# EAGLE board GPS_radiologger_LG77_CMWX_MAX v8 (EAGLE 9.7.0)
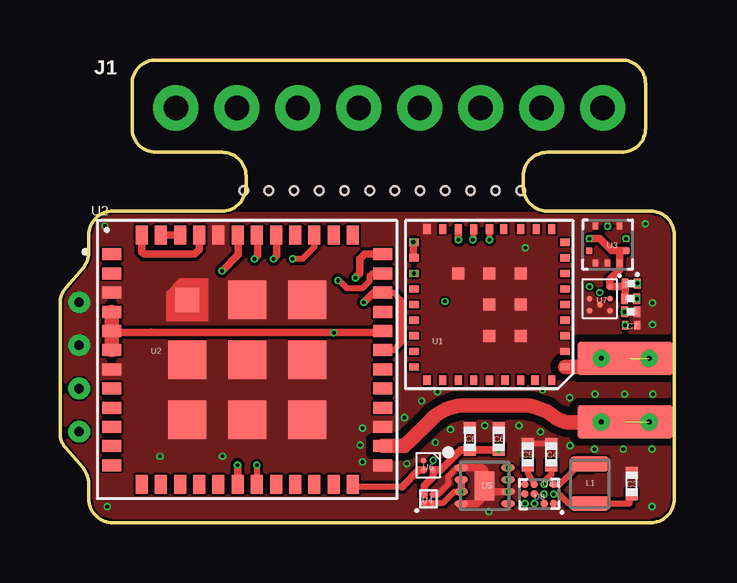
[diagram p0: board, top side]
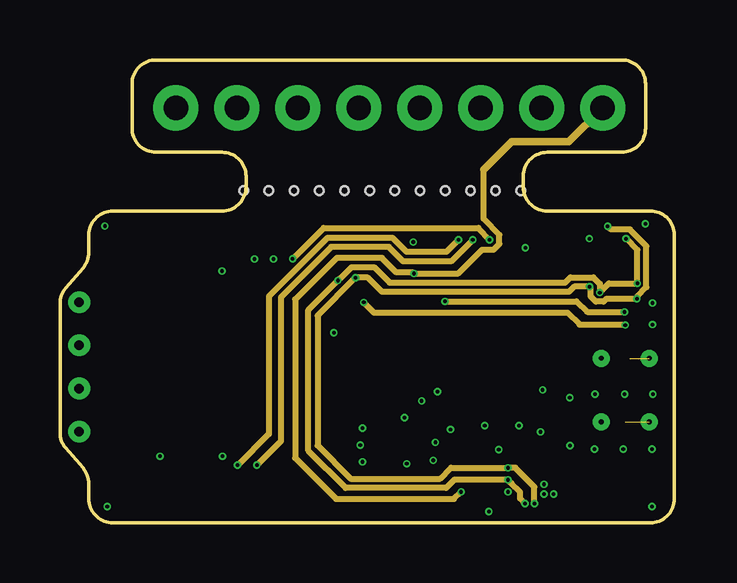
[diagram p1: board, inner layer Route2]
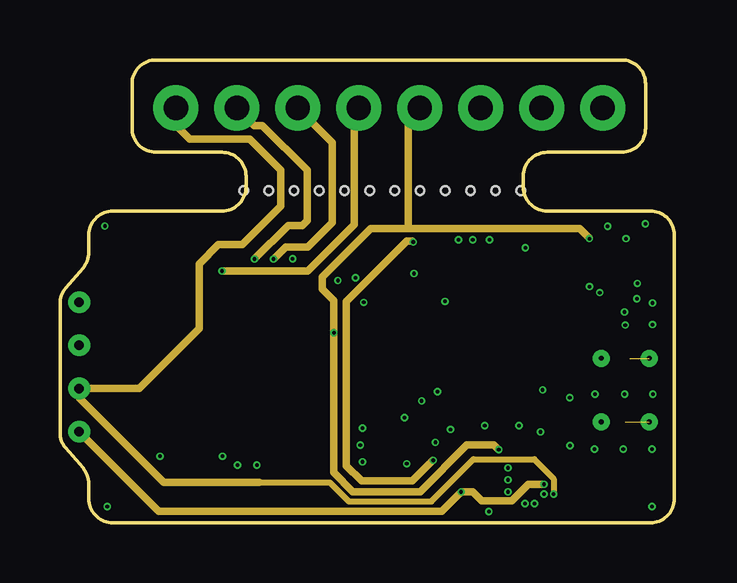
[diagram p2: board, inner layer Route15]
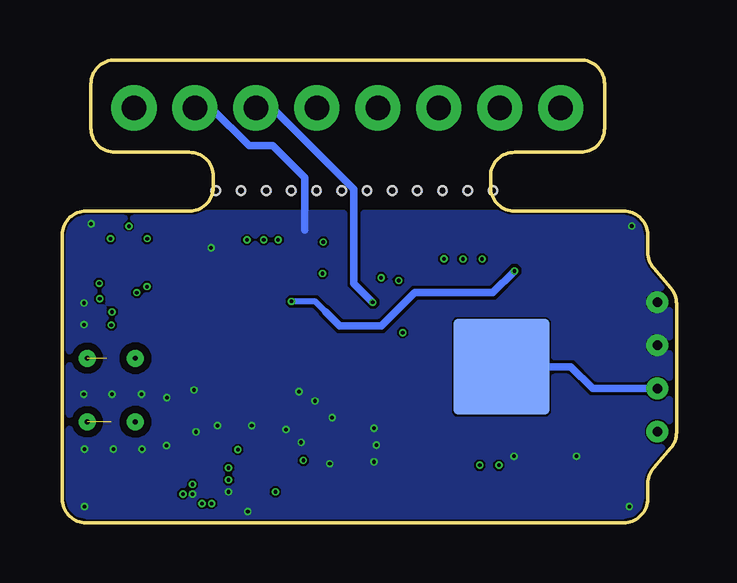
[diagram p3: board, bottom side, seen from below]

Size 25.6 x 19.3 mm. Coordinates in mm from the lower left corner, seen from the top.
Outline: 25.6,1 25.6,12 arc90 24.6,13 20.3,13 arc-90 19.3,14 19.3,14.45 arc-90 20.3,15.45 23.4,15.45 arc90 24.4,16.45 24.4,18.3 arc90 23.4,19.3 4,19.3 arc90 3,18.3 3,16.45 arc90 4,15.45 6.75,15.45 arc-90 7.75,14.45 7.75,14 arc-90 6.75,13 2.2,13 arc90 1.2,12 1.2,11.27 arc-41 0.96,10.62 0.24,9.78 arc41 0,9.13 0,3.77 arc41 0.24,3.12 0.96,2.28 arc-41 1.2,1.63 1.2,1 arc90 2.2,0 24.6,0 arc90 25.6,1
Copper layers (1*2+15*16): Top / Route2 / Route15 / Bottom
Stack-up Default Layer Stack: Top User Defined 0.035mm / Dielectric-2 User Defined 0.08mm / Route2 User Defined 0.035mm / Dielectric-1 User Defined 0.13mm / Route15 User Defined 0.035mm / Dielectric-3 User Defined 0.08mm / Bottom User Defined 0.035mm
Design rules "default *": minimum track width 5mil, minimum drill 0.15mm, track to track 5mil, track to pad 3mil, pad to pad 3mil, via to via 3mil, smd to smd 3mil, copper to edge 3mil, drill to drill 3mil, minimum pad ring 10mil, minimum via ring 3mil, stop-mask expansion 0mil, vias tented up to drill 20mil, thermal gap 0mil
Net classes: 0 default: width 0.254 mm; 1 power: width 0.305 mm; 2 antenna: width 0.61 mm, clearance 0.305 mm; 3 battery: width 0.254 mm; 4 diff_pair: width 0.178 mm, clearance 0.152 mm
Holes 0.35 mm at 7.65,13.85 8.7,13.85 9.75,13.85 10.8,13.85 11.85,13.85 12.9,13.85 13.95,13.85 15,13.85 16.05,13.85 17.1,13.85 18.15,13.85 19.2,13.85

## Footprints (pad centres in the part's own frame; a part is rotated, then mirrored left to right if it is on the bottom)
ICARUS_NITINOL_ANTENNA_SHORT = smd 4 x 1.4: 1 0,0 | drill 0.2: 2 -1,0; 3 1,0
C-0402-SMALL = smd 0.5 x 0.5: P$1 -0.45,0; P$2 0.45,0
C0201 = smd 0.25 x 0.35: 1 -0.25,0; 2 0.25,0
1X08_NO_SILK = drill 1.016 pad 1.88: 1 0,0; 2 2.54,0; 3 5.08,0; 4 7.62,0; 5 10.16,0; 6 12.7,0; 7 15.24,0; 8 17.78,0
INDC2016X120L = smd 0.6 x 1.612: 1 -0.825,0; 2 0.825,0
R0201 = smd 0.28 x 0.43: 1 -0.255,0; 2 0.255,0
XCVR_CMWX1ZZABZ-078 = smd 0.8 x 0.5: 1 -5.65,4.4; 2 -5.65,3.6; 3 -5.65,2.8; 4 -5.65,2; 5 -5.65,1.2; 6 -5.65,0.4; 7 -5.65,-0.4; 8 -5.65,-1.2; 9 -5.65,-2; 10 -5.65,-2.8; 11 -5.65,-3.6; 12 -5.65,-4.4; 25 5.65,-4.4; 26 5.65,-3.6; 27 5.65,-2.8; 28 5.65,-2; 29 5.65,-1.2; 30 5.65,-0.4; 31 5.65,0.4; 32 5.65,1.2; 33 5.65,2; 34 5.65,2.8; 35 5.65,3.6; 36 5.65,4.4 | smd 0.5 x 0.8: 13 -4.4,-5.2; 14 -3.6,-5.2; 15 -2.8,-5.2; 16 -2,-5.2; 17 -1.2,-5.2; 18 -0.4,-5.2; 19 0.4,-5.2; 20 1.2,-5.2; 21 2,-5.2; 22 2.8,-5.2; 23 3.6,-5.2; 24 4.4,-5.2; 37 4.4,5.2; 38 3.6,5.2; 39 2.8,5.2; 40 2,5.2; 41 1.2,5.2; 42 0.4,5.2; 43 -0.4,5.2; 44 -1.2,5.2; 45 -2,5.2; 46 -2.8,5.2; 47 -3.6,5.2; 48 -4.4,5.2 | smd 1 x 1: 49 -2.5,2.5 | smd 1.6 x 1.6: 50 0,2.5; 51 2.5,2.5; 52 -2.5,0; 53 0,0; 54 2.5,0; 55 -2.5,-2.5; 56 0,-2.5; 57 2.5,-2.5
PQFN50P200X200X80-10N = smd 0.275 x 0.25: 1 -0.765,0.25; 2 -0.765,-0.25; 6 0.765,-0.25; 7 0.765,0.25 | smd 0.25 x 0.275: 3 -0.5,-0.765; 4 0,-0.765; 5 0.5,-0.765; 8 0.5,0.765; 9 0,0.765 | smd 0.255 x 0.275: 10 -0.5,0.765
BGA4N35P2X2_70X70X40N = smd 0.26 x 0.26: A1 -0.175,0.175; A2 0.175,0.175; B1 -0.175,-0.175; B2 0.175,-0.175
SON50P200X200X75-9T80X120L = smd 0.562 x 0.282: 1 -0.975,0.75; 2 -0.975,0.25; 3 -0.975,-0.25; 4 -0.975,-0.75; 5 0.975,-0.75; 6 0.975,-0.25; 7 0.975,0.25; 8 0.975,0.75 | smd 0.8 x 1.2: 9 0,0
YFP0004-DSBGA = smd 0.25 x 0.25: A1 0.2,-0.2; A2 -0.2,-0.2; B1 0.2,0.2; B2 -0.2,0.2
WLCSP8 = smd 0.24 x 0.24: P$1 -0.5,0.425; P$2 0,0.425; P$3 0.5,0.425; P$4 -0.25,0; P$5 0.25,0; P$6 -0.5,-0.425; P$7 0,-0.425; P$8 0.5,-0.425
BGA12N40P4X3_123X163X64N = smd 0.32 x 0.32: A1 -0.6,0.4; A2 -0.2,0.4; A3 0.2,0.4; A4 0.6,0.4; B1 -0.6,0; B2 -0.2,0; B3 0.2,0; B4 0.6,0; C1 -0.6,-0.4; C2 -0.2,-0.4; C3 0.2,-0.4; C4 0.6,-0.4
LG77L = smd 0.4 x 0.3: P$1 -3.15,2.6; P$2 -3.15,1.95; P$3 -3.15,1.3; P$4 -3.15,0.65; P$5 -3.15,0; P$6 -3.15,-0.65; P$7 -3.15,-1.3; P$8 -3.15,-1.95; P$9 -3.15,-2.6; P$19 3.15,-2.6; P$20 3.15,-1.95; P$21 3.15,-1.3; P$22 3.15,-0.65; P$23 3.15,0; P$24 3.15,0.65; P$25 3.15,1.3; P$26 3.15,1.95; P$27 3.15,2.6 | smd 0.3 x 0.4: P$10 -2.6,-3.15; P$11 -1.95,-3.15; P$12 -1.3,-3.15; P$13 -0.6,-3.15; P$14 0,-3.15; P$15 0.65,-3.15; P$16 1.3,-3.15; P$17 1.95,-3.15; P$18 2.6,-3.15; P$28 2.6,3.15; P$29 1.95,3.15; P$30 1.3,3.15; P$31 0.65,3.15; P$32 0,3.15; P$33 -0.65,3.15; P$34 -1.3,3.15; P$35 -1.9,3.15; P$36 -2.6,3.15 | smd 0.5 x 0.5: P$37 0,0; P$38 0,1.3; P$39 -1.3,1.3; P$40 -1.3,0; P$41 -1.3,-1.3; P$42 0,-1.3; P$43 1.3,-1.3
BATT_CONNECT = drill 0.4: P$1 0,0
TJC_POS_ONLY = smd 4 x 4: P$1 0,0

## Placement (x,y rotation side)
ANT_GPS  NITINOL_ANTENNA_SHORT  [ICARUS_NITINOL_ANTENNA_SHORT]  23.55,6.86 0 top
ANT_LORA  NITINOL_ANTENNA_SHORT  [ICARUS_NITINOL_ANTENNA_SHORT]  23.55,4.21 0 top
C3  10UF  [C-0402-SMALL]  23.81,1.63 270 top
C4  1.0UF  [C-0402-SMALL]  20.47,2.85 270 top
C5  1.0UF  [C-0402-SMALL]  19.49,2.85 270 top
C6  1 uF  [C-0402-SMALL]  18.28,3.5 270 top
C7  [C0201]  23.8,8.24 0 top
C8  1 uF  [C-0402-SMALL]  17.08,3.5 90 top
J1  [1X08_NO_SILK]  22.61,17.3 180 top
L1  4.7 uH  [INDC2016X120L]  22.07,1.63 90 top
R1  4.7 k  [R0201]  23.78,9.35 180 top
R2  4.7 k  [R0201]  23.8,9.98 180 top
R3  10k  [R0201]  23.79,8.8 180 top
U2  CMWX1ZZABZ-078  [XCVR_CMWX1ZZABZ-078]  7.8,6.8 0 top
U3  BMP388  [PQFN50P200X200X80-10N]  22.82,11.6 180 top
U4  TPS7A03-DSBGA  [BGA4N35P2X2_70X70X40N]  15.35,1 90 top
U5  MAX17048G+  [SON50P200X200X75-9T80X120L]  17.69,1.54 0 top
U6  TPS22907YZT  [YFP0004-DSBGA]  15.35,2.4 90 top
U7  CAT24_WLCSP8  [WLCSP8]  22.49,9.35 270 top
U8  MAX20361  [BGA12N40P4X3_123X163X64N]  19.97,1.2 180 top
U$1  LG77L  [LG77L]  17.9,9.1 180 top
U$2  BATT_CONNECT  [BATT_CONNECT]  0.8,3.8 0 top
U$3  BATT_CONNECT  [BATT_CONNECT]  0.8,9.2 0 top
U$4  BATT_CONNECT  [BATT_CONNECT]  0.8,7.4 0 top
U$5  TJC_BASIC  [TJC_POS_ONLY]  7.3,6.5 0 bottom
U$6  BATT_CONNECT  [BATT_CONNECT]  0.8,5.6 0 top

## Library data of the parts
ANT_GPS ANT_LORA = Antenna
C3-C6 C8 U4 U5 U7 U8 U$2-U$6 = Ryan_Custom_Fusion
C7 = rcl; SPICEPREFIX: C
J1 = SparkFun-Connectors; PROD_ID: CONN-08438
L1 = Ryan_custom
R1-R3 = rcl; SPICEPREFIX: R
U2 = CMWX1ZZABZ-078; AVAILABILITY: In Stock; DESCRIPTION: General ISM < 1GHz LoRa™ Transceiver Module 868MHz, 915MHz - Surface Mount; MF: Murata; MP: CMWX1ZZABZ-078; PACKAGE: Module Murata; PRICE: None; PURCHASE-URL: https://pricing.snapeda.com/search/part/CMWX1ZZABZ-078/?ref=eda
U3 = BMP388; AVAILABILITY: Unavailable; DESCRIPTION: Pressure Sensor 4.35PSI ~ 18.13PSI (30kPa ~ 125kPa) Absolute 10-WFLGA; MF: Bosch Sensortec; MP: BMP388; PACKAGE: WFLGA-10 Bosch Tools; PRICE: None
U6 = TPS22916
U$1 = Quectel

## Nets
BAT [battery]: C4.P$2 J1.1 U4.A1 U4.B1 U5.2 U5.3 U8.C2 U$1.P$21 U$2.P$1
BOOT: J1.5 R3.2 U2.43
GND: C3.P$1 C4.P$1 C5.P$1 C6.P$1 C7.2 C8.P$2 J1.2 R3.1 U2.3 U2.7 U2.25 U2.27 U2.44 U2.49 U2.50 U2.51 U2.52 U2.53 U2.54 U2.55 U2.56 U2.57 U3.3 U3.5 U3.8 U3.9 U4.B2 U5.1 U5.4 U5.6 U5.9 U6.B1 U7.P$3 U7.P$5 U7.P$7 U7.P$8 U8.B2 U$1.P$2 U$1.P$18 U$1.P$37 U$1.P$38 U$1.P$39 U$1.P$40 U$1.P$41 U$1.P$42 U$1.P$43 U$3.P$1 U$4.P$1
GPS_ON: U2.24 U6.B2
GPS_PWR: U6.A1 U$1.P$19 U$1.P$20
GPS_RST: U2.39 U$1.P$14
N$2 [antenna]: ANT_GPS.1 ANT_GPS.2 ANT_GPS.3 U$1.P$1
N$3: L1.2 U8.C1
N$4: C5.P$2 U8.C3
N$11 [antenna]: ANT_LORA.1 ANT_LORA.2 ANT_LORA.3 U2.26
N$15 [battery]: C3.P$2 J1.8 L1.1 U8.B1 U$5.P$1 U$6.P$1
OSC_IN: U2.46 U2.47
OSC_OUT: U2.45 U2.48
POWER [power]: C6.P$2 C8.P$1 J1.4 R1.2 R2.2 U2.4 U2.5 U2.6 U2.32 U3.1 U3.6 U3.10 U4.A2 U6.A2 U7.P$1
RST: C7.1 J1.3 U2.31 U2.34
RX: U2.19 U$1.P$15
SCL: R2.1 U2.35 U3.2 U5.7 U7.P$4 U8.A4
SDA: R1.1 U2.36 U3.4 U5.8 U7.P$6 U8.A3
SWDCLK: J1.7 U2.42
SWDIO: J1.6 U2.41
TX: U2.18 U$1.P$16

## Tracks (layer width: path | path; a pad name or v marks a point on that pad's centre or on a via)
BAT  (via drill 0.15)
  Top 0.254: U8.C2 20.2,1.58 20.2,1.74 20.47,2.01 C4.P$2 | U4.A1 U4.B1 15.98,0.83 16.43,1.29 v16.71,1.29 | v14.75,10.39 | U$1.P$21 v14.75,10.39
  Top 0.305: v16.71,1.29 U5.2
  Route2 0.254: v16.71,1.29 16.41,0.99 11.51,0.99 9.8,2.7 9.8,9.31 11.54,11.05 13.41,11.05 14.02,10.44 14.71,10.44 v14.75,10.39 16.59,10.39 17.59,11.39 18.07,11.39 18.31,11.63 18.31,12.01 17.65,12.67 17.65,14.72
  Route2 0.305: J1.1 21.21,15.9 18.83,15.9 17.65,14.72
  Route15 0.305: U8.C2 19.51,1.6 18.82,0.91 17.58,0.91 17.2,1.29 v16.71,1.29 15.91,0.49 4.11,0.49 U$2.P$1
  other vias: 20.17,1.6
BOOT  (via drill 0.15)
  Top 0.305: v6.75,10.5 7.44,11.19 7.44,11.96 U2.43 | R3.2 v23.52,8.79
  Route2 0.254: v16.04,9.23 21.52,9.23 21.96,8.79 v23.52,8.79
  Route15 0.305: v6.75,10.5 10.33,10.5 12.25,12.43 12.25,17.11 J1.5
  Bottom 0.254: v16.04,9.23 15.06,9.23 14.61,8.78
  Bottom 0.305: v6.75,10.5 7.65,9.6 10.9,9.6 12.3,8.2 14.03,8.2 14.61,8.78
GND  (via drill 0.15)
  Top 0.254: C4.P$1 C5.P$1 | U4.B2 15.72,1.18 16.19,1.64 16.18,1.95 16.52,2.29 U5.1
  Top 0.305: U5.6 17.94,1.29 17.9,1.33 | 17.9,1.33 U5.9 17.7,2.18 17.59,2.29 U5.1 | U5.4 17.36,0.79 17.9,1.33
  Bottom 0.305: 15.5,12.2 15.5,14.4 16.83,15.73 17.81,15.73 19.38,17.3 J1.2
  other vias: 20.11,5.54 15.73,5.47 15.07,5.08 14.35,4.38 16.27,3.89 19.13,4.05 22.29,5.37 23.53,5.37 24.7,5.37 21.24,5.21 20.17,1.2 18.66,1.29 15.64,3.35 14.45,2.46 20.02,3.79 17.7,4.05 21.25,3.21 12.51,3.24 24.67,3.07 23.47,3.07 22.27,3.07 24.69,8.27 24.69,9.17 24.39,12.47 19.39,11.47 6.77,2.77 4.17,2.77 24.67,0.67 17.87,0.47 1.97,0.67 1.87,12.37 12.61,3.94 12.61,2.54
  pour Top: -0.1,12.95 26.07,12.95 26.16,-1.4 -0.1,-1.4
  pour Bottom: -0.47,13.05 26.41,13.05 26.41,-1.73 -0.59,-1.73 -0.59,-0.04
GPS_ON
  Top 0.254: 14.25,1.5 12.3,1.5 U2.24
  Top 0.305: U6.B2 14.95,2.2 14.25,1.5
GPS_PWR  (via drill 0.15)
  Top 0.254: U$1.P$19 v14.72,11.7 v14.72,11.71
  Top 0.305: U$1.P$20 14.72,11.07 v14.72,11.7
  Route15 0.305: U6.A1 15.53,2.6 14.68,1.75 12.56,1.75 11.93,2.38 11.93,9.23 14.44,11.74 14.69,11.74 v14.72,11.71
  other vias: 15.55,2.6
GPS_RST  (via drill 0.15)
  Top 0.254: U2.39 10.6,11.5 10.1,11 v9.7,11 v9.69,11.01 | U$1.P$14 v17.9,11.8
  Route2 0.254: v9.69,11.01 10.99,12.3 17.44,12.3 v17.9,11.8
N$2  (1 unrouted)
  Top 0.61: 23.74,6.85 23.69,6.86 ANT_GPS.1 ANT_GPS.2 | U$1.P$1 22.7,6.5 ANT_GPS.3
N$3
  Top 0.254: U8.C1 20.82,1.6 21.67,2.46
  Top 0.61: L1.2 21.67,2.46
N$4
  Top 0.254: U8.C3 19.74,1.6 19.74,1.71 19.49,2.07 C5.P$2
N$11  (1 unrouted)
  Top 0.61: U2.26 14.35,3.2 14.63,3.48 15.4,4.22 arc-44 16.73,4.89 19.26,4.89 arc-39 20.57,4.44 arc39 21.33,4.18 22.52,4.18 | 22.52,4.18 ANT_LORA.2 | ANT_LORA.1 23.52,4.18 22.52,4.18
N$15  (via drill 0.15)
  Top 0.254: U8.B1 20.79,1.2 21.17,0.82 L1.1 23.74,0.81 C3.P$2
  Route15 0.254: U8.B1 20.57,1.84 19.77,2.64 17.22,2.64 15.47,0.89 12.03,0.89 11.25,1.68 8.3,1.68
  Route15 0.305: 8.3,1.68 4.32,1.68 0.8,5.2 U$6.P$1 3.3,5.6 5.8,8.1 5.8,10.8 6.6,11.6 7.6,11.6 9.2,13.2 9.2,14.7 7.9,16 5.4,16 4.83,16.57 J1.8
  Bottom 0.305: U$6.P$1 3.5,5.6 4.4,6.5 U$5.P$1
  other vias: 20.57,1.2
OSC_IN
  Top 0.305: U2.46 U2.47
OSC_OUT
  Top 0.305: U2.48 3.4,11.3 3.5,11.2 5.6,11.2 5.8,11.4 U2.45
POWER  (via drill 0.15)
  Top 0.305: U3.6 22.49,11.85 22.99,11.35 23.34,11.35 | 23.34,11.35 U3.1 | 23.34,11.35 23.32,11.33 U3.10 23.32,10.55 22.91,10.14 U7.P$1 23.41,9.85 R2.2 23.54,9.37 R1.2 | U4.A2 15.18,1.54 15.55,1.92 U6.A2 15.86,2.21 15.99,2.34 16,2.34 16.71,3.05 C8.P$1 C6.P$2 | 3.81,7.94 3.8,7.95 | v11.42,7.94 3.81,7.94 | v11.41,7.93 v11.42,7.94 | U2.32 13.39,7.94 v11.42,7.94 | 3.81,7.94 2.21,7.94 U2.5
  Top 0.61: U2.6 U2.5 U2.4
  Route15 0.305: U3.6 22.05,11.87 21.65,12.27 14.5,12.27 | C6.P$2 18.08,3.25 16.95,3.25 15,1.3 12.2,1.3 11.41,2.09 v11.41,7.93 11.41,9.27 10.93,9.75 10.93,10.25 12.95,12.27 14.5,12.27 | 14.5,12.27 14.5,16.68 14.99,17.17 J1.4
  other vias: 22.05,11.85 18.28,3.05
RST  (via drill 0.15)
  Top 0.254: U2.34 13.9,9.6 14.2,9.3 14.2,7.5 13.9,7.2 U2.31
  Top 0.305: U2.34 13.07,9.6 v12.66,9.19
  Route2 0.254: v12.66,9.19 13.08,8.77 21.14,8.77 21.65,8.26 23.54,8.26 C7.1
  Bottom 0.305: v12.66,9.19 13.45,9.98 13.45,13.92 16.83,17.3 J1.3
  other vias: 23.55,8.24
RX  (via drill 0.15)
  Top 0.254: v8.2,2.4 U2.19 | v17.2,11.8 17.24,11.85 U$1.P$15
  Route2 0.254: v17.2,11.8 16.3,10.9 14.3,10.9 13.7,11.5 11.3,11.5 9.2,9.4 9.2,3.4 v8.2,2.4
SCL  (via drill 0.15)
  Top 0.254: v11.58,10.1 11.58,10.12 11.6,10.14 11.96,9.78 12.61,9.78 12.9,10.07 12.9,10.3 13,10.4 U2.35
  Route2 0.254: U8.A4 19.17,1 19.17,1.29 18.81,1.64 U5.7 16.43,1.79 16.09,1.45 11.9,1.45 10.35,3 10.35,8.88 v11.58,10.1 11.67,10.19 11.69,10.19 12.15,10.66 13.09,10.66 13.74,10.01 21.04,10.01 21.26,10.23 22.22,10.23 22.49,9.96 U7.P$4 22.87,9.98 v24.05,9.98 24.05,11.38 v23.58,11.85
  other vias: 19.37,0.8 18.66,1.79 22.49,9.6
SDA  (via drill 0.15)
  Top 0.254: 12.33,10.22 v12.31,10.22
  Top 0.305: U2.36 12.7,11.2 12.49,10.99 12.49,10.4 v12.31,10.22
  Route2 0.254: U8.A3 19.77,1.49 18.97,2.29 U5.8 16.29,2.29 15.84,1.84 12.11,1.84 10.73,3.22 10.73,8.64 v12.31,10.22 12.83,10.22 13.42,9.63 21.2,9.63 21.42,9.85 U7.P$6 22.11,9.81 22.11,9.44 22.33,9.22 22.65,9.22 22.77,9.34 R1.1 v24.04,9.35 24.04,9.42 24.44,9.82 24.44,11.54 23.74,12.23 22.95,12.23 U3.4
  other vias: 22.82,12.37 19.77,0.8 18.66,2.29 22.06,9.85
SWDCLK  (via drill 0.15)
  Top 0.305: v8.1,11 8.24,11.14 8.24,11.96 U2.42
  Route15 0.305: J1.7 8.1,16.57 8.43,16.57 10.3,14.7 10.3,12.6 10.1,12.4 9.5,12.4 v8.1,11
SWDIO  (via drill 0.15)
  Top 0.305: v8.9,11 9.04,11.14 9.04,11.96 U2.41
  Route15 0.305: v8.9,11 9.4,11.5 10.32,11.5 11.35,12.53 11.35,15.86 J1.6
TX  (via drill 0.15)
  Top 0.305: v7.4,2.4 U2.18 | v16.6,11.8 U$1.P$16
  Route2 0.254: v16.6,11.8 16.1,11.3 14.44,11.3 13.86,11.88 11.14,11.88 8.7,9.44 8.7,3.7 v7.4,2.4

## Text on the board
tNames: R2 | U7 | R1 | R3 | U1 | C7 | U2 | C8 | C6 | C5 | C4 | U6 | U8 | L1 | C3 | U4